# Altium PCB Gate_Driver_SMPS_V2.0_PCB2.PcbDoc
Units mil, origin at the board's own origin, x right, y up, seen from the top; angles counter-clockwise.
Board outline 2303.15 x 1181.1 mil, 2 copper layers (Top Layer, Bottom Layer), stack 22.485 mil thick; 42 components, 33 nets, 126 pads, 39 vias.
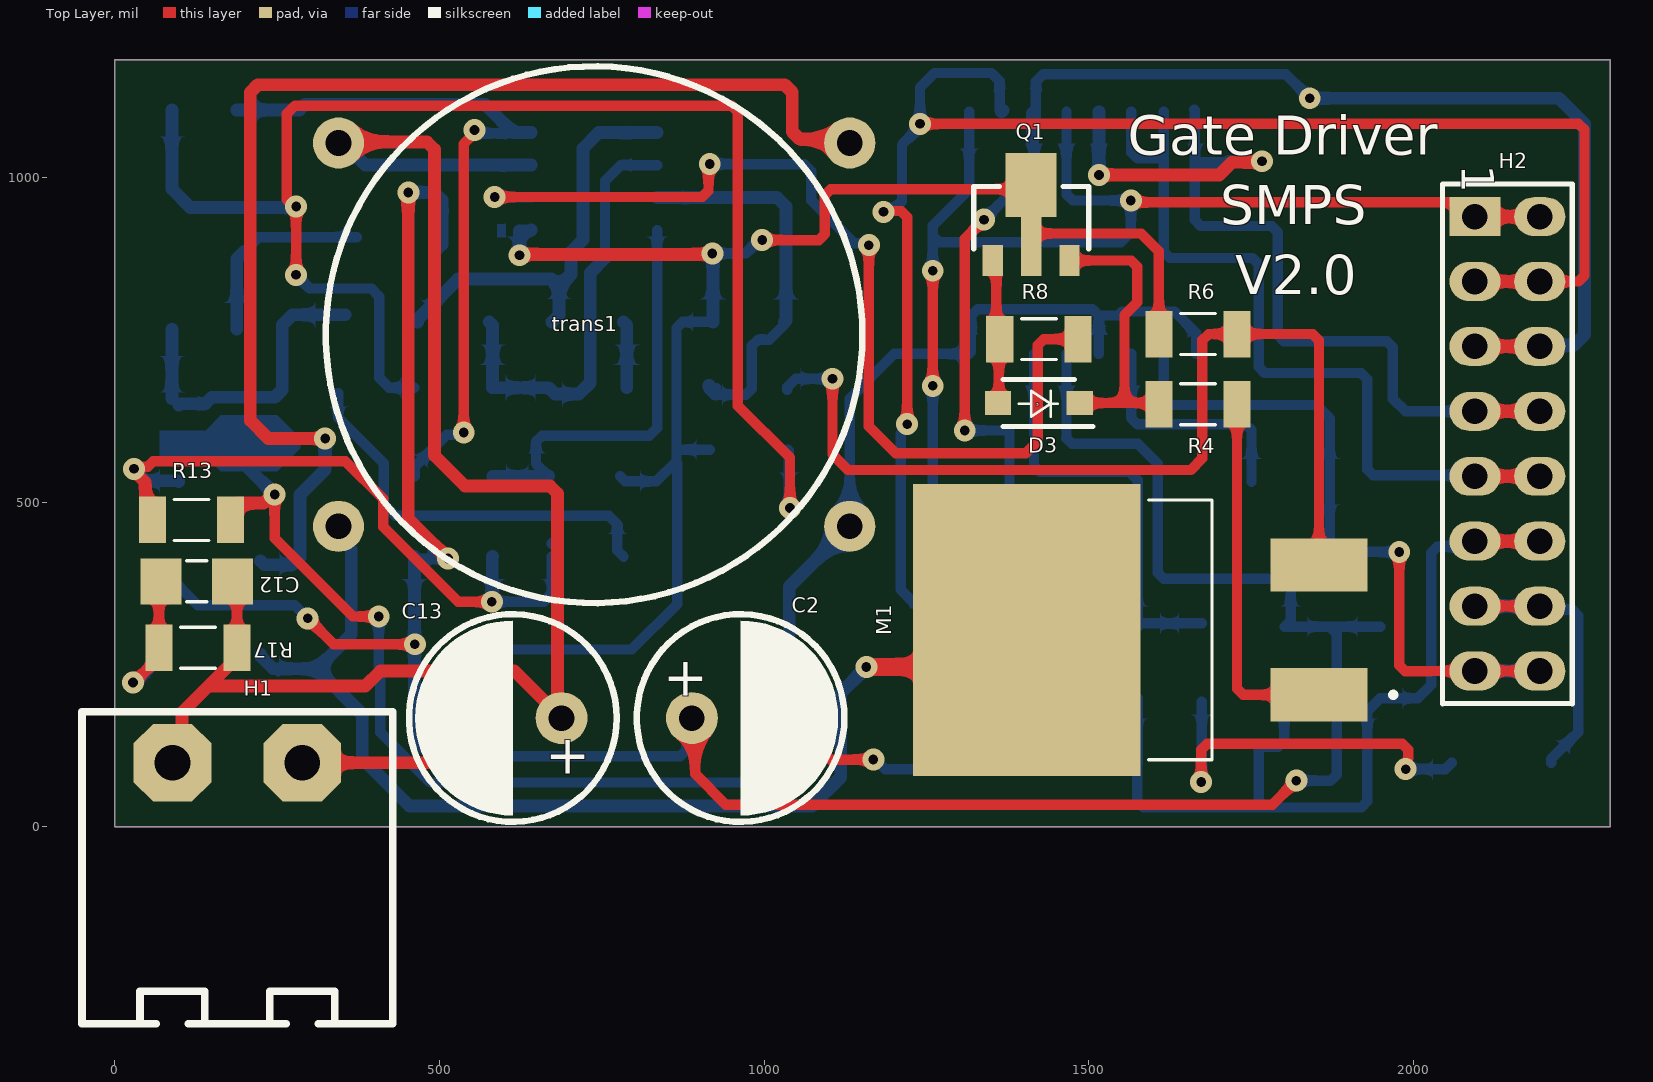
[diagram p0: Top Layer view]
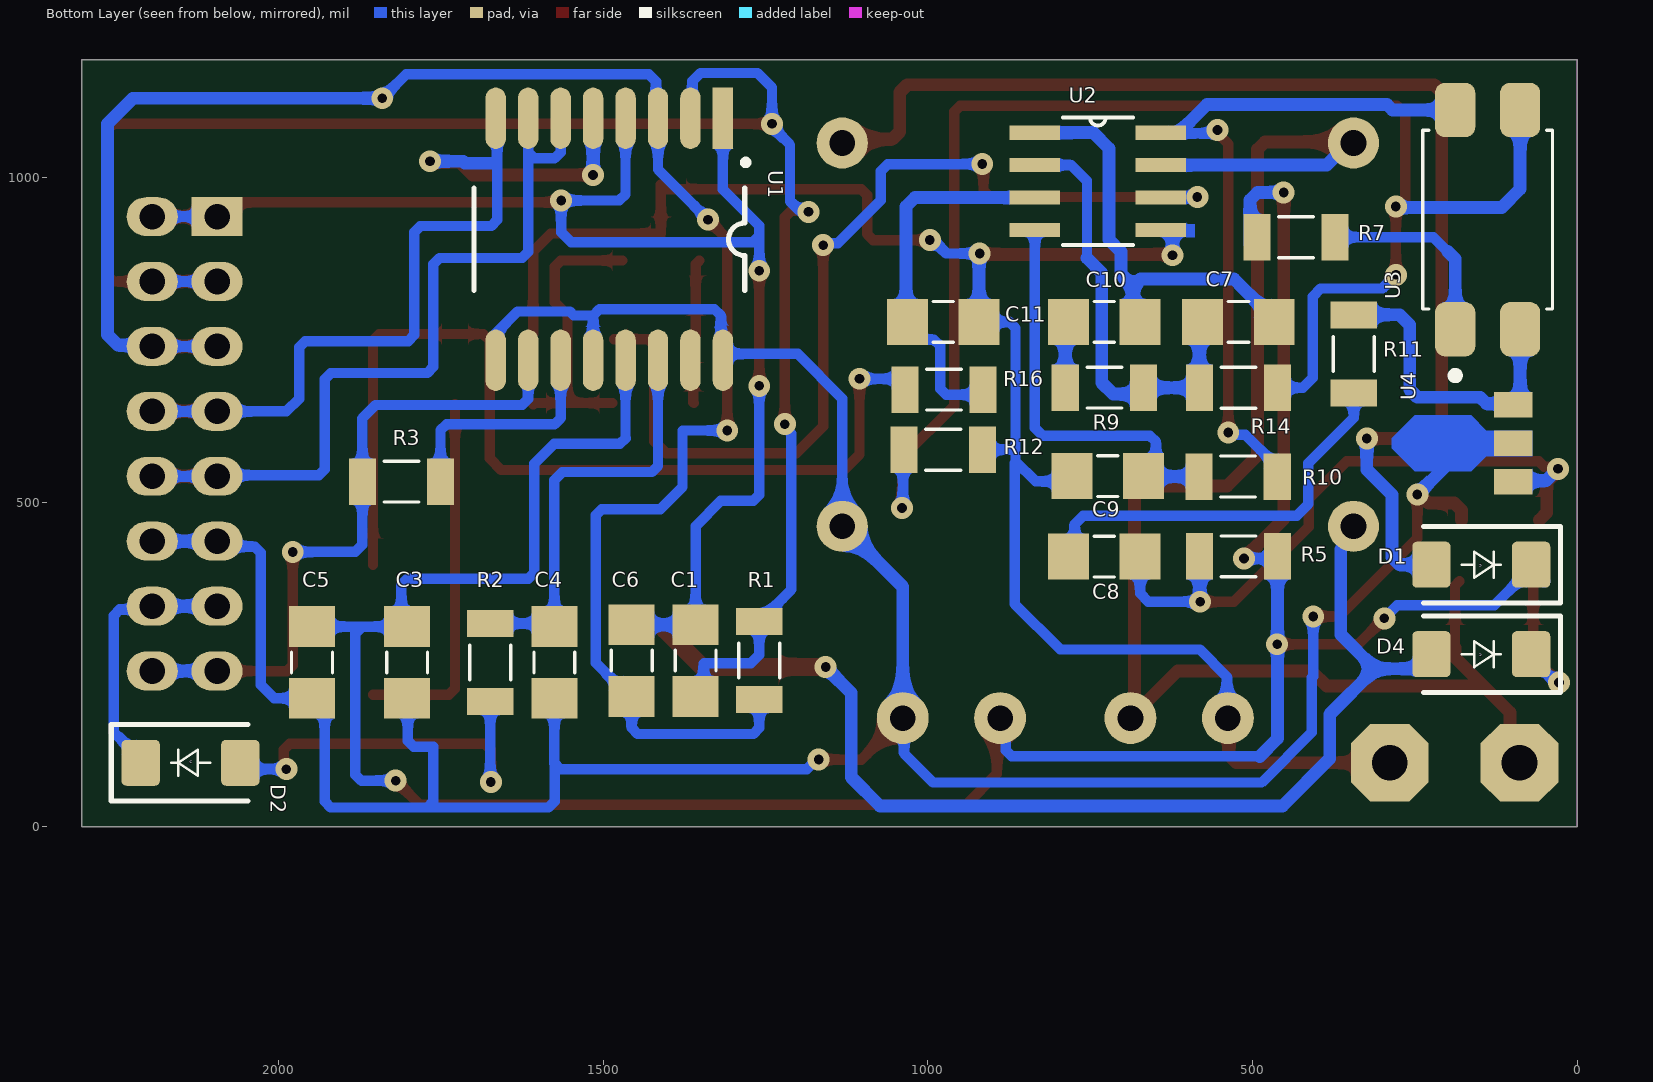
[diagram p1: Bottom Layer view, seen from below]
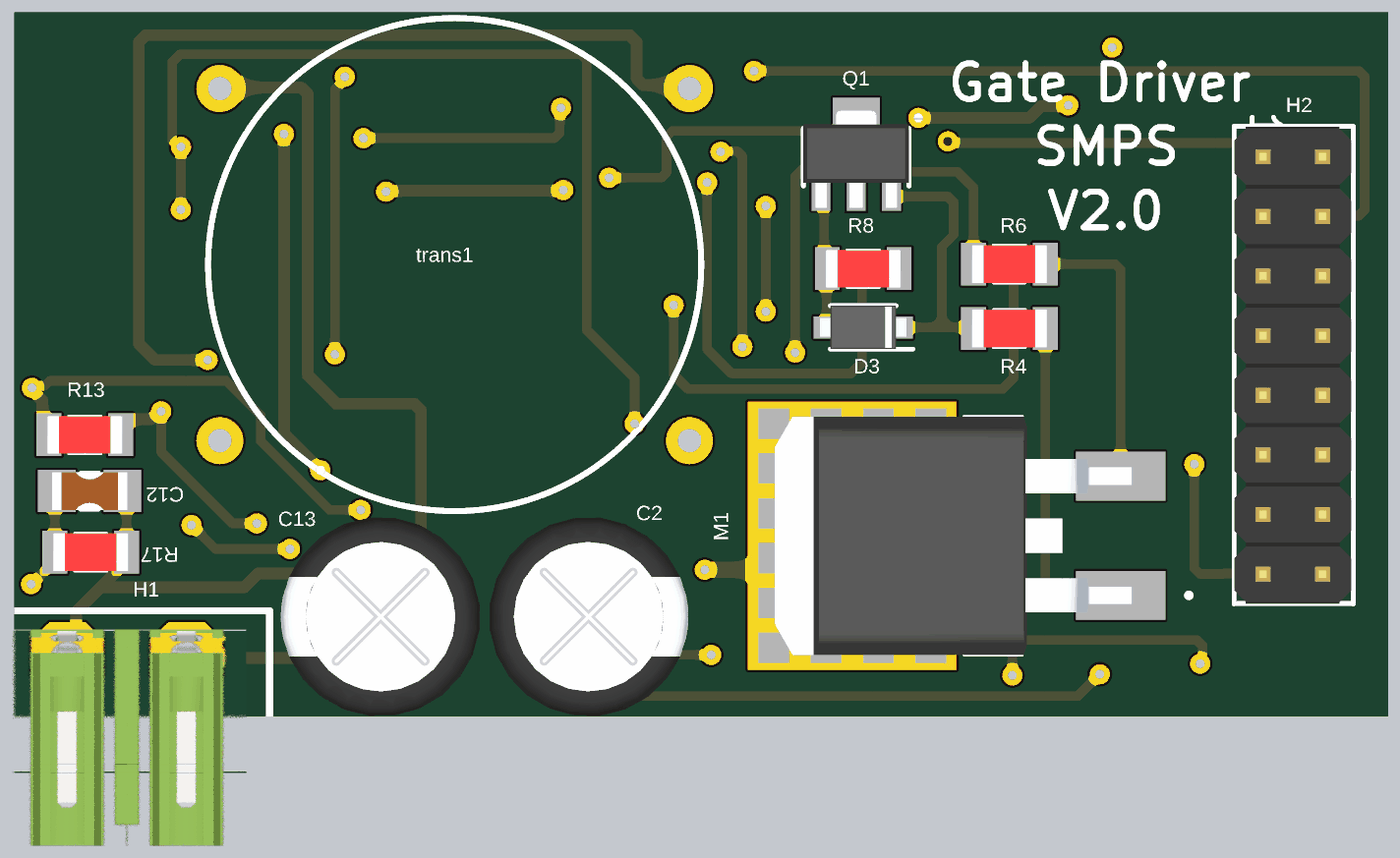
[diagram p2: 3D render of the assembled board from above, using the file's embedded part models]
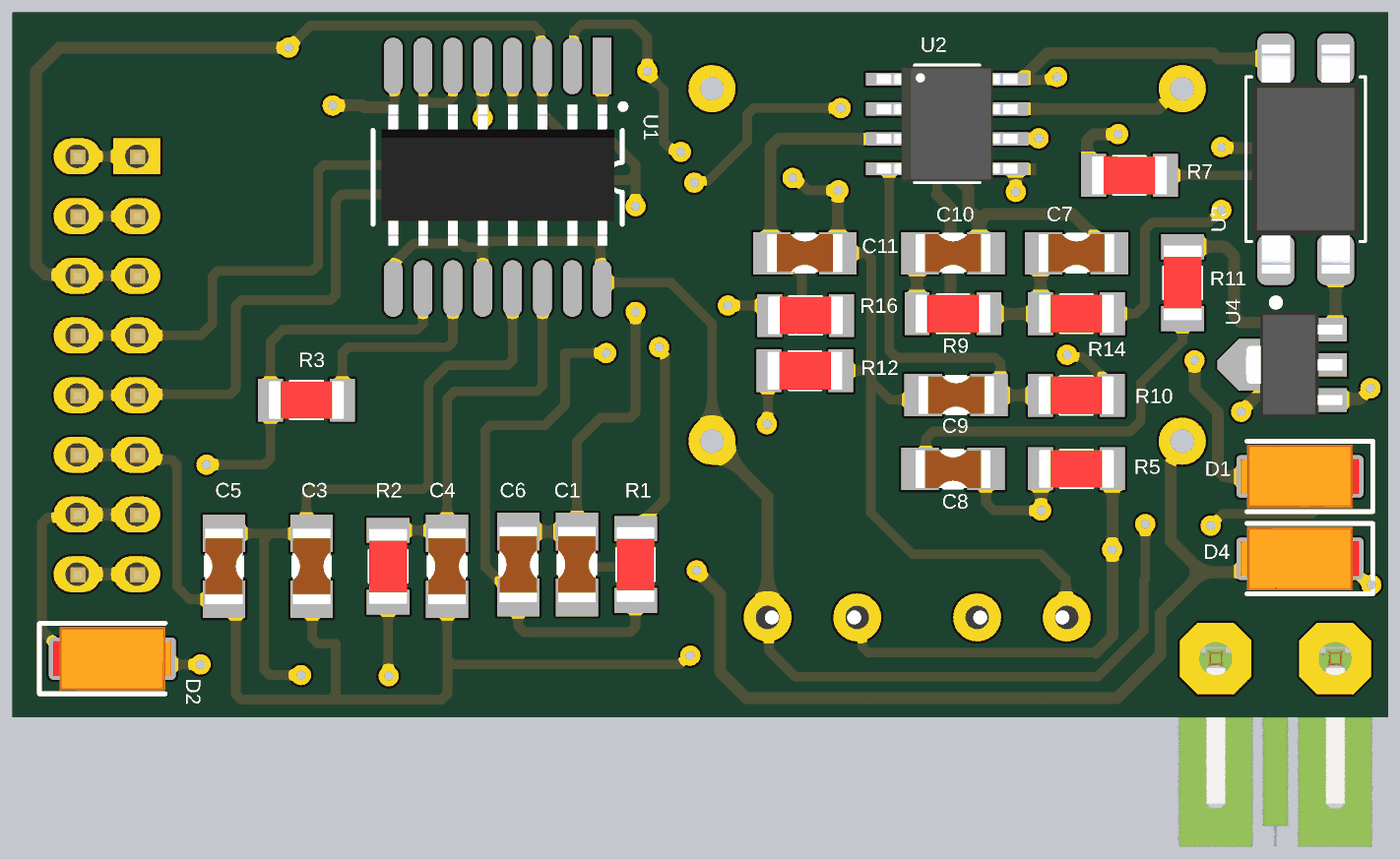
[diagram p3: 3D render of the assembled board from below, using the file's embedded part models]

## Layer stack, top to bottom
Top Solder: solder mask 0.4, Solder Resist, Dk 3.5
Top Layer: signal copper 1.4
Dielectric 1: dielectric 19.685, FR-4, Dk 4.8
Bottom Layer: signal copper 1.4
Bottom Solder: solder mask 0.4, Solder Resist, Dk 3.5

## Board outline
0,0 2303.15,0 2303.15,1181.1 0,1181.1

## Design rules (kind name [scope] priority, off if disabled: settings)
Clearance [All] p1: gap=10 ignorepadtopadclearanceinfootprint=FALSE except(1: Arc-Text Track-Text SMDPad-Text THPad-Text Via-Text)
HoleSize [All] p1: absolutevalues=TRUE maxlimit=3000 minlimit=11.81 maxpercent=80.000 minpercent=20.000
HoleToHoleClearance [All] p1: gap=1 allowstackedmicrovias=TRUE
PolygonConnect [All] p1: connectstyle=Relief reliefconductorwidth=10 reliefentries=4 polygonreliefangle="90 Angle" airgapwidth=10
RoutingVias [All] p1: holewidth=24 width=33.8 viastyle="Through Hole" minholewidth=15 minwidth=33.8 maxholewidth=31.5 maxwidth=34
SilkToSilkClearance [All] p1: silktosilkclearance=1
SilkToSolderMaskClearance [IsPad] p1: minsilkscreentomaskgap=1 clearancetoexposedcopper=TRUE
SolderMaskExpansion [All] p1: expansion=4 istentingtop=FALSE
Width [All] p1: maxlimit=27.56 minlimit=16 preferedwidth=19.68
26 further rules are at their usual default settings.

## Components (designator, comment, footprint, x,y, rotation, side; value= is the part's Value field where it differs from the comment)
C1 "0.1u" CAP_1206 1357.87,255.91 r90 bottom
C2 "470u-50v" CAP-1.5 888.78,167.32 r0 top
C3 "100p" CAP_1206 1802.17,252.95 r270 bottom
C4 "0.1u" CAP_1206 1575.39,252.95 r270 bottom
C5 "0.1u" CAP_1206 1948.82,252.95 r270 bottom
C6 "1n" CAP_1206 1456.3,255.91 r90 bottom
C7 "10nAC" CAP_1206 521.65,777.56 r180 bottom
C8 "10n" CAP_1206 728.35,415.94 r180 bottom
C9 "13.6n" CAP_1206 723.1,540.03 r180 bottom
C10 "10nAC" ? 728.35,777.56 r180 bottom
C11 "100pf" CAP_1206 976.38,777.56 r0 bottom
C12 "3.3n" CAP_1206 126.12,378 r0 top
C13 "470u-50v" CAP-1.5 687.99,167.32 r180 top
D1 "Diode" US1K_SMD 147.64,403.54 r0 bottom
D2 "Diode" US1K_SMD 2135.83,98.43 r180 bottom
D3 "1N5817" 1N5817W 1423.23,652.56 r180 top
D4 "Diode" US1K_SMD 147.64,265.75 r0 bottom
H1 "PS-IN" "TB2 - V" 88.58,98.43 r0 top
H2 "H2*8" HDR2X8 2094.88,939.76 r270 top
M1 "IRF540N" IRF540N_SMD 1579.72,303.15 r180 top
Q1 "B772-PNP" B772_SMD 1411.42,935.04 r0 top
R1 "4.7K" RES_1206 1259.84,255.91 r90 bottom
R2 "100" RES_1206 1674.21,252.95 r90 bottom
R3 "8.2" RES_1206 1811.02,531.5 r0 bottom
R4 "20" RES_1206 1668.31,650.59 r180 top
R5 "13.5K" RES_1206 521.65,416.34 r180 bottom
R6 "0.25/4W" RES_1206 1668.31,758.86 r0 top
R7 "1K" RES_1206 433,908 r0 bottom
R8 "47" RES_1206 1423.23,750.98 r0 top
R9 "11.2K" RES_1206 728.35,676.25 r0 bottom
R10 "600-POTENTIO" RES_1206 521.99,539.37 r180 bottom
R11 "16K" RES_1206 344,728 r270 bottom
R12 "1K" RES_1206 976.38,580.71 r0 bottom
R13 "2.5K" RES_1206 118.11,472.44 r180 top
R14 "5.6K" RES_1206 521.65,676.12 r180 bottom
R16 "42K" RES_1206 975.39,673.23 r0 bottom
R17 "510" RES_1206 127.95,275.59 r0 top
trans1 "C055928A" C055928A 344.49,462.6 r0 top
U1 "FOD8332" "SO16 - W" 1315.75,1091.18 r270 bottom
U2 "UC3843BN" UC3843_SMD 738.19,994.09 r180 bottom
U3 "PC817" PC816_SMD 137.8,935.04 r90 bottom
U4 "TL431" VREG_TL431IPK 177.17,590.55 r90 bottom

## Footprints (in the part's own frame and the unit in brackets; to place one, negate y for a bottom-side part, rotate by r counter-clockwise, add the part's x,y. Pads: shape width x height; smd on the part's side, far side on the other; paste and mask are expansions set on the pad)
1N5817W [mm]
  rect 1.02x0.94 smd: A(1.6,0) C(-1.6,0)
  silkscreen extent -2.11,-0.92 1.4,0.92, body extent -1.85,-0.92 1.85,0.92, height 1.35
B772_SMD [mm]
  rect 0.8x1.2 smd: B(-1.5,-1.6) E(1.5,-1.6)
  rect 0.8x2.3 smd paste-2 mask+0: C(0,-1.05)
  rect 2x2.5 smd: C(0,1.36)
  silkscreen extent -2.25,-1.15 2.25,1.3, body extent -2.25,-2.07 2.25,2.05, height 1.6
C055928A [mm]
  round 2 hole 1: 1(0,0) 2(0,15) 3(20,0) 4(20,15)
  silkscreen extent -0.5,-3 20.5,18
CAP-1.5 [mil]
  round 80 hole 39.37: 1(0,0) 2(150,0)
  silkscreen extent -85,-160 235,160, body extent -93,-167 241,167, height 551
CAP_1206 [mm]
  rect 1.6x1.8 smd: 1(-1.4,0) 2(1.4,0)
  silkscreen extent -0.4,-0.8 0.4,0.8, body extent -1.6,-0.8 1.6,0.8, height 1.5
HDR2X8 [mm] "Connector; Header; 4x2 Position"
  oval 1.524x2 hole 1: 1(0,2.54) 2(2.54,2.54) 2(2.54,0) 3(5.08,2.54) 3(5.08,0) 4(7.62,0) 4(7.62,2.54) 5(10.16,0) 5(10.16,2.54) 6(12.7,0) 6(12.7,2.54) 7(15.24,0) 7(15.24,2.54) 8(17.78,0) 8(17.78,2.54)
  rect 1.524x2 hole 1: 1(0,0)
  silkscreen extent -1.27,-1.27 19.08,3.81, body extent -1.24,-1.27 19.08,3.73, height 8.6
IRF540N_SMD [mm]
  rect 8.89x11.43 smd paste-7: D(4.445,0)
  rect 3.81x2.08 smd: G(-6.985,2.54) S(-6.985,-2.54)
  silkscreen extent -9.99,-5.08 -0.32,5.08, body extent -7.49,-5.08 7.75,5.08, height 4.83
PC816_SMD [mm]
  rrect50% 2.13x1.57 smd: 1(-4.29,1.27) 2(-4.29,-1.27) 3(4.29,-1.27) 4(4.29,1.27)
  silkscreen extent -6.25,-2.54 3.5,2.54, body extent -4.87,-2.29 4.87,2.29, height 4
RES_1206 [mm]
  rect 1.06x1.82 smd: 1(-1.528,0) 2(1.528,0)
  silkscreen extent -0.68,-0.8 0.68,0.8, body extent -1.6,-0.8 1.6,0.8, height 0.7
"SO16 - W" [mm]
  rect 2.4x0.8 smd: 1(0,0)
  oval 2.4x0.8 smd: 2(0,-1.27) 3(0,-2.54) 4(0,-3.81) 5(0,-5.08) 6(0,-6.35) 7(0,-7.62) 8(0,-8.89) 9(9.47,-8.89) 10(9.47,-7.62) 11(9.47,-6.35) 12(9.47,-5.08) 13(9.47,-3.81) 14(9.47,-2.54) 15(9.47,-1.27) 16(9.47,0)
  silkscreen extent 1.63,-9.74 6.73,0.99, body extent 1.65,-9.39 7.65,0.51, height 1.4
"TB2 - V" [mil] "Terminal Block Vertical"
  oct 120x120 hole 55.12: 1(0,0) 2(200,0)
  silkscreen extent -139,-402 339,79, body extent -100,-315 300,47, height 283
UC3843_SMD [mil]
  rect 78x22 smd: 1(-97,75) 2(-97,25) 3(-97,-25) 4(-97,-75) 5(97,-75) 6(97,-25) 7(97,25) 8(97,75)
  silkscreen extent -54,-98 54,98, body extent -118,-96 118,96, height 69
US1K_SMD [mm]
  rrect25% 1.5x1.8 smd: A(1.95,0) K(-1.95,0)
  silkscreen extent -3.1,-1.5 2.25,1.5, body extent -2.53,-1.35 2.52,1.35, height 2.17
VREG_TL431IPK [mm]
  rect 1x1.5 smd paste-2 mask+0: A(0,-2)
  rect 1x1.5 smd: C(1.5,-2) R(-1.5,-2)
  Top Layer region: 1.1,1.85 1.1,-0.35 0.5,-0.95 0.5,-2.75 -0.5,-2.75 -0.5,-0.95 -1.1,-0.35 -1.1,1.85 -0.2,2.75 0.2,2.75
  body extent -2.25,-2.56 2.25,1.54, height 1.6
? [mm]
  rect 1.6x1.8 smd: 2(1.4,0) S(-1.4,0)
  silkscreen extent -0.4,-0.8 0.4,0.8, body extent -1.6,-0.8 1.6,0.8, height 1.5

## Part data
C1 C2 C3 C4 C5 C6 C13: library part CAP-DC
C7 C8 C9 C10 C11 C12: library part CAP-AC
D3: "Lite-On 1N5817, Schottky Diode, 20V 3A, 2-Pin DO-201AD", Average Rectified Current=3A, Case/Package=DO-201AD, Forward Voltage=850mV, Manufacturer=Vishay, Manufacturer Part Number=1N5820, Max Forward Surge Current (Ifsm)=80A, Max Operating Temperature=125°C, Max Repetitive Reverse Voltage (Vrrm)=20V, Max Reverse Current=150uA, Max Reverse Leakage Current=2mA, Min Operating Temperature=-65°C, Supplier Part Number 1=700-9899, ComponentLink1Description=http://www.liteon-semi.com/download.php?hSFile=1N5820-1N5822-5.pdf&hDFile=tecfile01312524214.pdf&src-supplier=Avnet+Asia, ComponentLink1URL=http://www.liteon-semi.com/download.php?hSFile=1N5820-1N5822-5.pdf&hDFile=tecfile01312524214.pdf&src-supplier=Avnet+Asia, ComponentLink2Description=http://docs-usa.electrocomponents.com/techlib:/itc_doclist_US.htm?stockno=7009899&src-supplier=Allied+Electronics, ComponentLink2URL=http://docs-usa.electrocomponents.com/techlib:/itc_doclist_US.htm?stockno=7009899&src-supplier=Allied+Electronics, Element Configuration=Single, Forward Current=3A, Height=5.3mm, Length=9.5mm, Max Surge Current=80A, Mount="Through Hole", Number of Pins=2, Packaging=Bulk, Peak Non-Repetitive Surge Current=80A, Radiation Hardening=No, RoHS Compliant=No, Stock 1=0, Supplier 1=RSComponents, Width=5.3mm
H1: library part PS-plug
H2: library part "Header 8X2"
M1: "Mosfet, Power; N-ch; Vdss 100V; Rds(on) 44MILLIOHMS; Id 33A; TO-220AB; Pd 130W; -55DEG", Case/Package=TO-220AB, Continuous Drain Current (ID)=33A, Gate to Source Voltage (Vgs)=20V, Manufacturer="International Rectifier", Max Operating Temperature=175°C, Min Operating Temperature=-55°C, Power Dissipation=130W, Supplier Part Number 1=IRF540NPBF-TUBE, ComponentLink1Description=http://www.produktinfo.conrad.com/datenblaetter/150000-174999/162412-da-01-en-IRF_540_N.pdf?src-supplier=Conrad, ComponentLink1URL=http://www.produktinfo.conrad.com/datenblaetter/150000-174999/162412-da-01-en-IRF_540_N.pdf?src-supplier=Conrad, Manufacturer Part Number=IRF540N, Mount="Through Hole", Number of Elements=1, Number of Pins=3, RoHS Compliant=No, Stock 1=0, Supplier 1="Future Electronics"
R1 R2 R3 R4 R5 R6 R7 R8 R9 R10 R11 R12 R13 R14 R16 R17: library part RES
trans1: library part "flyback trans"
U1: library part TLP5214A
U2: "IC REG CTRLR BST/FLYBK 8-MINIDIP", Case/Package=PDIP, Frequency=250kHz, Manufacturer=STMicroelectronics, Max Frequency=500kHz, Max Operating Temperature=150°C, Max Power Dissipation=800mW, Max Supply Current=17mA, Max Supply Voltage=30V, Min Operating Temperature=-40°C, Min Supply Voltage=12V, Output Current=1A, Output Voltage=5.1V, Package Quantity=50, ComponentLink1Description=http://www.st.com/content/ccc/resource/technical/document/datasheet/b6/e8/cc/ba/4f/cd/42/9b/CD00000966.pdf/files/CD00000966.pdf/jcr:content/translations/en.CD00000966.pdf?src-supplier=Digi-Key, ComponentLink1URL=http://www.st.com/content/ccc/resource/technical/document/datasheet/b6/e8/cc/ba/4f/cd/42/9b/CD00000966.pdf/files/CD00000966.pdf/jcr:content/translations/en.CD00000966.pdf?src-supplier=Digi-Key, ComponentLink2Description=http://www.mouser.com/ds/2/389/uc2842b-974450.pdf?src-supplier=Mouser, ComponentLink2URL=http://www.mouser.com/ds/2/389/uc2842b-974450.pdf?src-supplier=Mouser, ComponentLink3Description=http://www.st.com/web/en/resource/technical/document/datasheet/CD00000966.pdf?src-supplier=Avnet, ComponentLink3URL=http://www.st.com/web/en/resource/technical/document/datasheet/CD00000966.pdf?src-supplier=Avnet, ComponentLink4Description=http://www.st.com/web/en/resource/technical/document/datasheet/CD00000966.pdf?src-supplier=Future+Electronics, ComponentLink4URL=http://www.st.com/web/en/resource/technical/document/datasheet/CD00000966.pdf?src-supplier=Future+Electronics, ComponentLink5Description=https://www.verical.com/server-webapp/html/getDatasheet?partID=66041&src-supplier=Verical, ComponentLink5URL=https://www.verical.com/server-webapp/html/getDatasheet?partID=66041&src-supplier=Verical, ComponentLink6Description=http://www.produktinfo.conrad.com/datenblaetter/1100000-1199999/001185662-da-01-en-IC_REG_CTRLR_PWM_CM_UC3843BN_DIP_8_STM.pdf?src-supplier=Conrad, ComponentLink6URL=http://www.produktinfo.conrad.com/datenblaetter/1100000-1199999/001185662-da-01-en-IC_REG_CTRLR_PWM_CM_UC3843BN_DIP_8_STM.pdf?src-supplier=Conrad, Duty Cycle=100%, Fall Time=50ns, Height=3.32mm, Lead Free="Lead Free", Length=10.92mm, Manufacturer Part Number=UC3843BN, Max Duty Cycle=100%, Mount="Through Hole", Number of Outputs=1, Number of Pins=8, Packaging=Rail/Tube, Power Dissipation=800mW, Pricing 1="1=0.9063, 10=0.7523, 25=0.7389, 100=0.6172, 250=0.5737, 500=0.4903, 1000=0.3493, 4000=0.3129, 5000=0.3123, 6000=0.3104, 8000=0.3085, 10000=0.3066, 20000=0.3047, 25000=0.3027, 30000=0.3008, 50000=0.2988 (USD)", Radiation Hardening=No, REACH SVHC="No SVHC", Rise Time=50ns, RoHS Compliant=Yes, Series=-, Stock 1=669, Supplier 1="Arrow Electronics", Supplier Part Number 1=UC3843BN, Switching Frequency=500kHz, Topology=Boost,Flyback, Weight=0.032805oz, Width=6.6mm
U3: "Optocoupler DC-IN 1-CH Transistor DC-OUT 4-Pin PDIP Sleeve", Case/Package=PDIP, Collector Emitter Saturation Voltage=200mV, Collector Emitter Voltage (VCEO)=35V, Current Transfer Ratio=600%, Forward Current=50mA, Forward Voltage=1.4V, Manufacturer=Sharp, Max Operating Temperature=100°C, Min Operating Temperature=-30°C, Power Dissipation=200mW, Reverse Breakdown Voltage=6V, Fall Time=18000ns, Input Type=DC, Manufacturer Part Number=PC817, Mount="Through Hole", Number of Elements=1, Number of Pins=4, Packaging=Sleeve, Rise Time=18000ns, RoHS Compliant=No, Stock 1=0, Supplier 1="Arrow Electronics", Supplier Part Number 1=PC817
U4: library part TL431CZ, "V-Ref Adjustable 2.495V to 36V 100mA 3-Pin TO-92 Bulk", Case/Package=TO-92, Cathode Current=1mA, Manufacturer=STMicroelectronics, Max Input Voltage=37V, Max Operating Temperature=70°C, Max Output Current=100mA, Max Output Voltage=36V, Min Operating Temperature=0°C, Min Output Voltage=2.495V, Package Quantity=1, Temperature Coefficient=100ppm/°C, Tolerance=2.21%, Accuracy=2%, ComponentLink1Description=http://www.st.com/web/en/resource/technical/document/datasheet/CD00000986.pdf?src-supplier=Digi-Key, ComponentLink1URL=http://www.st.com/web/en/resource/technical/document/datasheet/CD00000986.pdf?src-supplier=Digi-Key, ComponentLink2Description=http://www.st.com/content/ccc/resource/technical/document/datasheet/2d/27/af/41/03/e2/44/8e/CD00000986.pdf/files/CD00000986.pdf/jcr:content/translations/en.CD00000986.pdf?src-supplier=Digi-Key, ComponentLink2URL=http://www.st.com/content/ccc/resource/technical/document/datasheet/2d/27/af/41/03/e2/44/8e/CD00000986.pdf/files/CD00000986.pdf/jcr:content/translations/en.CD00000986.pdf?src-supplier=Digi-Key, ComponentLink3Description=http://www.farnell.com/datasheets/1690313.pdf?src-supplier=Element14, ComponentLink3URL=http://www.farnell.com/datasheets/1690313.pdf?src-supplier=Element14, ComponentLink4Description=http://www.rapidonline.com/pdf/82-0290.pdf?src-supplier=Rapid+Electronics, ComponentLink4URL=http://www.rapidonline.com/pdf/82-0290.pdf?src-supplier=Rapid+Electronics, ComponentLink5Description=https://www.verical.com/server-webapp/html/getDatasheet?partID=98639&src-supplier=Verical, ComponentLink5URL=https://www.verical.com/server-webapp/html/getDatasheet?partID=98639&src-supplier=Verical, ComponentLink6Description=http://www.produktinfo.conrad.com/datenblaetter/150000-174999/155641-da-01-en-SPG_REF_TL431CZ_STM.pdf?src-supplier=Conrad, ComponentLink6URL=http://www.produktinfo.conrad.com/datenblaetter/150000-174999/155641-da-01-en-SPG_REF_TL431CZ_STM.pdf?src-supplier=Conrad, Height=4.4mm, Lead Free="Lead Free", Length=4.7mm, Manufacturer Part Number=TL431CZ, Mount="Through Hole", Nominal Supply Current=1mA, Number of Channels=1, Number of Pins=3, Output Current=100mA, Output Type=Adjustable, Output Voltage=36V, Packaging=Bulk, Pricing 1="1=0.4405, 10=0.3422, 100=0.2291, 500=0.1883, 1000=0.1722, 2500=0.1137, 10000=0.083, 1=0.3921, 10=0.3046, 100=0.2039, 500=0.1676, 1000=0.1299, 2500=0.1012, 10000=0.0723 (USD)", Radiation Hardening=No, REACH SVHC="No SVHC", Reference Type=Shunt,Adjustable, Reference Voltage=36V, RoHS Compliant=Yes, Series=-, Stock 1=5333, Supplier 1="Arrow Electronics", Supplier Part Number 1=TL431CZ, Supply Current=1mA, Weight=0.01lb, Width=3.7mm
D1 D2 D4: Datasheet=https://diotec.com/de/produktliste/D.html, ki_description=Diode, ki_keywords=Diode, Reference=D

## Via types
v1: diameter 33.8, hole 15, Top Layer to Bottom Layer, 39 vias

## Nets (pads, with @x,y where several pads share a name; then routed paths per layer and width w, separated by ;. In a path a pad name is that pad's centre, name@x,y a point inside that pad or via, vN(x,y) a via of type N, cw(c..) or ccw(c..) an arc to the next point about the centre after c; other vN are vias at no path point)
C: D2.K H2.7 | length 509
  Top Layer w16: H2.7@2094.88,339.76 H2.7@2194.88,339.76
  Bottom Layer w16: H2.7@2194.88,339.76 2200,334.65 2244.56,334.65 2253.94,325.27 2253.94,145.67 2212.6,104.33 D2.K
  Bottom Layer w19.68: H2.7@2094.88,339.76 H2.7@2194.88,339.76
F: C6.1 H2.3 R1.1 U1.3 | length 3018.9
  Top Layer w16: v1(1309.06,610.24) 1309.06,905.51 v1(1338.58,935.04)
  Top Layer w19.68: H2.3@2094.88,739.76 H2.3@2194.88,739.76
  Bottom Layer w16: R1.1 1259.84,152.09 1269.22,142.72 1446.93,142.72 1456.3,152.09 C6.1 1460.24,200.79 1511.81,252.36 1511.81,479.8 1502.44,489.17 1412.4,489.17 1377.95,523.62 1377.95,610.24 v1(1309.06,610.24) ; v1(1338.58,935.04) 1415.75,1012.2 U1.3 1418.71,1094.15 1418.71,1147.71 1430,1159 1803.6,1159 v1(1840.55,1122.05) ; H2.3@2094.88,739.76 H2.3@2194.88,739.76
  Bottom Layer w19.68: U1.3@1412.06,1057.64 1413.49,1059.07 1413.49,1098.92 U1.3@1415.75,1101.18 ; v1(1840.55,1122.05) 2224.41,1122.05 2263.78,1082.68 2263.78,757.87 2247.37,741.46 2196.58,741.46 H2.3@2194.88,739.76
G: H2.8 R3.2 U1.10 | length 1139
  Top Layer w16: v1(1978.35,423.23) 1978.35,248.54 1987.72,239.16 2026.15,239.16 2026.75,239.76 2094.88,239.76 H2.8@2194.88,239.76
  Bottom Layer w16: U1.10@1615.75,728.35 1615.75,658.98 1625.12,649.61 1850.39,649.61 1871.18,628.82 R3.2 1871.18,434.17 1882.13,423.23 v1(1978.35,423.23)
  Bottom Layer w19.68: H2.8@2094.88,239.76 H2.8@2194.88,239.76
GNDK: H2.4 U1.5 U1.8 | length 1522
  Top Layer w19.68: v1(1515.75,1003.94) 1701.07,1003.94 1720.57,1023.44 1765.44,1023.44 v1(1767,1025) ; H2.4@2094.88,639.76 H2.4@2194.88,639.76
  Bottom Layer w16: U1.8@1662.78,1104.15 1663.39,1103.54 1663.39,1021.84 1663.39,934.57 1672.76,925.2 1781.97,925.2 1791.34,915.82 1791.34,757.4 1800.71,748.03 1959.13,748.03 1968.5,738.66 1968.5,659.45 1988.19,639.76 2094.88,639.76 H2.4@2194.88,639.76
  Bottom Layer w19.68: v1(1515.75,1003.94) U1.5@1515.75,1101.18 ; 1666.17,1021.84 1713.1,1021.84 1716.25,1025 v1(1767,1025)
Isns: M1.S R6.2 R16.2 | length 1498.3
  Top Layer w16: v1(1105.32,689.96) 1105.32,573.82 1129.8,549.34 1657.09,549.34 1675.2,567.44 1675.2,749.49 1684.57,758.86 R6.2 1845.35,758.86 1854.72,749.49 M1.S
  Bottom Layer w16: R16.2 1035.55,677.09 1048.42,689.96 v1(1105.32,689.96)
NetC4_1: C4.1 R2.2 U1.14 | length 668.1
  Bottom Layer w16: U1.14@1415.75,728.35 1415.75,555.63 1425.12,546.26 1562.99,546.26 1575.39,533.86 C4.1 1580.43,313.11 R2.2
NetC7_1: C7.1 R9.1 R14.1 U2.2 | length 676
  Bottom Layer w16: 755,875.87 755,995 779.09,1019.09 U2.2
  Bottom Layer w19.68: C7.1 581.81,772.52 R14.1 668.06,676.12 R9.1 678.1,666.34 714.57,666.34 732.13,683.9 732.13,853 755,875.87
NetC7_2: C7.2 C10.2 U2.1 | length 663.2
  Bottom Layer w19.68: C7.2 466.54,781.5 515.2,830.16 528.54,843.5 547.73,843.5 672.52,843.5 684.06,831.97 ; C10.2 684.06,788.39 684.06,831.97 ; U2.1 745.28,1069.09 721,1044.82 721,904 702.44,885.44 702.44,850.36 684.06,831.97
NetC8_1: C8.1 R11.2 | length 626.7
  Bottom Layer w16: R11.2 344,630 414,560 414,497 432,479 761,479 773.99,466.01 773.99,425.41 C8.1
NetC8_2: C8.2 R5.1 R13.2 U4.R | length 1064
  Top Layer w16: v1(29.53,551.18) 32.93,554.59 50.81,554.59 59.32,563.1 354.9,563.1 413.1,504.9 413.1,461.9 528.54,346.46 v1(580.71,346.46)
  Top Layer w19.68: v1(29.53,551.18) 29.53,547.36 46.93,529.96 46.93,483.46 R13.2
  Bottom Layer w16: v1(580.71,346.46) 660.43,346.46 673.23,359.25 C8.2 ; C8.2@672.83,436.42 C8.2@673.23,436.02
  Bottom Layer w19.68: v1(29.53,551.18) 47.74,532.97 96.95,532.97 U4.R ; v1(580.71,346.46) 581.26,347.01 581.26,415.79 R5.1
NetC9_2: C9.2 R10.1 U2.4 | length 647
  Bottom Layer w16: C9.2 648.62,559.38 648.62,592.99 657.99,602.36 822.83,602.36 835.19,614.72 U2.4
  Bottom Layer w19.68: R10.1 667.32,539.37 C9.2
NetC10_1: C10.S R9.2 | length 103.4
  Bottom Layer w19.68: C10.S 788.5,772.52 R9.2
NetC11_2: C11.2 R16.1 U2.3 | length 621.4
  Bottom Layer w16: R16.1 923.11,665.35 971.93,665.35 981.3,674.73 981.3,740.75 990.67,750.13 1008,750.13 1031.5,773.62 C11.2 ; R16.1@915.35,680.12 920.28,675.2 R16.1@926.38,675.2
  Bottom Layer w19.68: U2.3 1019.96,969.09 1033.79,955.27 1033.79,779.85 C11.2 ; R16.1@915.35,680.12 915.35,677.36 R16.1@926.38,666.34
NetC12_1: C12.1 D4.K R17.1 | length 238.9
  Top Layer w16: v1(28,222) 29.17,222 67.8,260.63 R17.1 67.8,374.8 C12.1
  Bottom Layer w16: v1(28,222) 31.41,225.41 36.43,225.41 70.87,259.84 D4.K
NetD1_A: D1.A trans1.4 | length 1900.1
  Top Layer w19.68: v1(324,598) 236.37,598 208.66,625.7 208.66,1131.19 220.19,1142.72 1031.78,1142.72 1043.31,1131.19 1043.31,1070.32 1054.84,1058.79 1126.25,1058.79 trans1.4
  Bottom Layer w19.68: D1.A@224.41,409.45 230.32,403.54 273.74,403.54 285.28,415.07 285.28,511.38 324,550.1 v1(324,598)
NetD2_A: D2.A R2.1 | length 607.5
  Top Layer w16: v1(1673.23,68.9) 1673.23,118.58 1682.6,127.95 1982.97,127.95 1992.35,118.58 1992.35,105.33 1991.59,104.58 1991.59,91.99 v1(1988.19,88.58)
  Bottom Layer w16: v1(1673.23,68.9) 1674.21,69.88 R2.1 ; v1(1988.19,88.58) 2049.21,88.58 D2.A
NetD3_A: D3.A Q1.B R8.1 | length 225.1
  Top Layer w16: Q1.B 1357.72,866.69 1357.72,756.34 R8.1 1361.65,749.57 1361.65,653.98 D3.A
NetD3_C: D3.C Q1.E R4.2 | length 449.2
  Top Layer w16: Q1.E 1565.43,872.05 1574.8,862.67 1574.8,807.66 1555.12,787.98 1555.12,652.56 ; D3.C 1555.12,652.56 ; R4.2 1606.18,652.56 1555.12,652.56
NetD4_A: D4.A M1.D trans1.1 | length 1713.4
  Top Layer w27.56: v1(1157.48,246.06) 1347.64,246.06 M1.D
  Bottom Layer w19.68: D4.A 224.41,262.8 244.09,243.11 311.11,243.11 ; 364.17,426.93 364.17,296.17 311.11,243.11 ; v1(1157.48,246.06) 1157.48,245.23 1118.11,205.86 1118.11,76.11 1074,32 454,32 381,105 381,173.22 311.11,243.11
NetM1_G: M1.G R4.1 | length 568.2
  Top Layer w16: R4.1 1728.46,212.52 1737.84,203.15 M1.G
NetR3_1: R3.1 U1.11 | length 371
  Bottom Layer w16: U1.11@1565.75,728.35 1565.75,629.45 1575.12,620.08 1741.49,620.08 1750.87,610.71 R3.1
NetR7_1: R7.1 U3.1 | length 307.2
  Bottom Layer w16: 199.33,885.83 221.5,908 R7.1
  Bottom Layer w19.68: U3.1 187.8,874.3 199.33,885.83
NetR11_1: R11.1 U3.2 U4.C | length 478.5
  Bottom Layer w19.68: U4.C@87.8,659.45 U3.2 ; U4.C 100.44,651.62 139.62,651.62 149.42,661.42 246.34,661.42 257.87,672.95 257.87,772.64 273.74,788.5 R11.1@354.33,788.5
PGND: C9.1 C11.1 C13.2 H1.2 Q1.C R6.1 R12.1 U2.5 | length 2829.3
  Top Layer w16: v1(997.05,903.54) 1084.13,903.54 1093.5,912.92 1093.5,972.63 1102.88,982 1404.82,982 1411.42,988.59 Q1.C@1411.42,913.67 ; Q1.C@1411.42,905.92 1419.17,913.67 1580.78,913.67 1608.15,886.3 R6.1
  Top Layer w19.68: H1.2 524.87,98.43 536.4,109.96 536.4,165.73 C13.2 ; v1(623.25,880.25) 624.56,881.56 918.96,881.56 v1(920.28,882.87)
  Bottom Layer w16: C13.2 539.32,168.65 539.32,231.32 581,273 796.14,273 866.14,343 866.14,559.53 ; C9.1 786.24,532 834.17,532 865.16,562.99 865.16,584.65 ; R12.1 869.09,580.71 865.16,584.65 ; v1(920.28,882.87) 971.56,882.87 992.23,903.54 v1(997.05,903.54) ; C11.1 874.53,777.56 865.16,768.19 865.16,584.65
  Bottom Layer w19.68: v1(623.25,880.25) 623.25,917.94 640.03,917.94 U2.5 ; v1(920.28,882.87) 921.26,881.89 C11.1
PMW: H2.5 U1.6 U1.7 | length 1331.9
  Top Layer w19.68: H2.5@2094.88,539.76 H2.5@2194.88,539.76
  Bottom Layer w16: U1.6@1565.75,1101.18 1565.75,1038.9 1575.12,1029.53 1606.38,1029.53 1615.75,1038.9 ; U1.7@1615.75,1101.18 1615.75,1038.9 ; H2.5@2194.88,539.76 2094.88,539.76 2093.31,541.34 1938.51,541.34 1929.13,550.71 1929.13,689.45 1919.76,698.82 1771.18,698.82 1761.81,708.19 1761.81,866.14 1751.97,875.98 1625.12,875.98 1615.75,885.36 1615.75,1038.9
pwm: R8.2 U2.6 | length 1533
  Top Layer w16: v1(585,970) 905,970 914.37,979.37 914.37,1017.72 916.34,1019.69 v1(916.34,1020.67) ; v1(1161.42,895.67) 1161.42,616.66 1202.74,575.34 1403.15,575.34 1421.26,593.44 1421.26,741.61 1430.63,750.98 R8.2
  Bottom Layer w16: v1(585,970) 585.45,969.55 640.74,969.55 U2.6 ; v1(916.34,1020.67) 1062.01,1020.67 1072.83,1009.84 1072.83,964.57 1138.65,898.75 1158.34,898.75 v1(1161.42,895.67)
SGND: C2.2 C3.2 C4.2 C5.2 H2.6 R13.1 trans1.3 U1.9 U1.12 U1.16 U4.A | length 4679
  Top Layer w16: v1(246.06,511.81) 246.06,443.94 366.18,323.82 v1(406.5,323.82) ; C2.2 1102.76,103.35 v1(1168.31,103.35)
  Top Layer w19.68: R13.1 178.27,487.4 189.29,498.43 228.86,498.43 242.24,511.81 v1(246.06,511.81) ; H2.6@2094.88,439.76 H2.6@2194.88,439.76
  Bottom Layer w16: v1(406.5,323.82) 406.5,231.61 408.84,229.26 408.84,145.28 486.12,68 992,68 1036.7,112.7 1036.7,165.24 C2.2 ; trans1.3 1131.89,659.45 1200.79,728.35 1315.75,728.35 1318.71,731.31 1318.71,787.22 1328.74,797.24 1505.91,797.24 1515.75,787.4 ; v1(1168.31,103.35) 1171.82,103.35 1186.58,88.58 1566.02,88.58 1574.8,97.36 ; U1.12@1515.75,728.35 1515.75,787.4 ; C4.2 1575.39,97.96 1574.8,97.36 ; U1.9@1665.75,728.35 1665.75,759.84 1632,793.59 1551.77,793.59 1545.58,787.4 1515.75,787.4 ; C3.2 1801.18,196.85 1801.18,132.4 1791.81,123.03 1761.81,123.03 1761.81,38.9 1771.18,29.53 ; H2.6@2094.88,439.76 2086.46,431.34 2036.93,431.34 2027.56,421.97 2027.56,218.5 2006.89,197.83 C5.2 1929.13,178.15 1929.13,38.9 1919.76,29.53 1771.18,29.53 ; 1574.8,97.36 1574.8,39.37 1584.65,29.53 1771.18,29.53
  Bottom Layer w19.68: 203.74,592.52 203.74,554.13 v1(246.06,511.81) ; C2.2 1038.78,369.49 trans1.3@1130.91,461.62 ; H2.6@2094.88,439.76 H2.6@2194.88,439.76
uGND: C1.2 C6.2 H2.1 U1.1 U1.4 | length 2316.7
  Top Layer w16: v1(1259.84,679.13) v1(1259.84,856.3) ; v1(1564.96,964.57) 1567.76,961.76 2072.88,961.76 H2.1@2094.88,939.76
  Top Layer w19.68: H2.1@2094.88,939.76 H2.1@2194.88,939.76
  Bottom Layer w16: v1(1259.84,679.13) 1259.84,511.34 1269.22,501.97 1318.9,501.97 1357.87,462.99 C1.2 ; v1(1259.84,856.3) 1259.84,909.98 ; U1.1@1315.75,1101.18 U1.1 1315.75,981.75 1259.84,925.84 1259.84,909.98 ; U1.4@1465.75,1101.18 1465.75,973.94 1475.12,964.57 v1(1564.96,964.57) 1564.96,915.35 1549.75,900.14 1269.68,900.14 1259.84,909.98 ; H2.1@2094.88,939.76 H2.1@2194.88,939.76
  Bottom Layer w19.68: C1.2 C6.2
VCC: C1.1 H2.2 R1.2 U1.2 | length 2820.8
  Top Layer w16: v1(1184,947.1) 1185.26,948.36 1211.1,948.36 1220.47,938.99 v1(1220.47,620.08) ; v1(1240.16,1082.68) 2254.41,1082.68 2263.78,1073.3 2263.78,849.14 2254.41,839.76 H2.2@2194.88,839.76
  Top Layer w19.68: H2.2@2094.88,839.76 H2.2@2194.88,839.76
  Bottom Layer w16: v1(1184,947.1) 1187.41,950.51 1199.54,950.51 1212.36,963.33 1212.36,1050.06 1240.16,1077.86 v1(1240.16,1082.68) 1240.16,1138.06 1263.09,1161 1349.91,1161 1362.78,1148.12 1362.78,1104.15 U1.2@1365.75,1101.18 ; v1(1220.47,620.08) 1220.47,615.26 1210.63,605.42 1210.63,365.28 R1.2 1259.84,264.76 1272.64,251.97 1344.49,251.97 1345.47,250.98 1345.47,213.19 C1.1 ; H2.2@2094.88,839.76 H2.2@2194.88,839.76
  Bottom Layer w19.68: U1.2@1365.75,1101.18 U1.2@1368.01,1103.44
Vfb: R12.2 R14.2 U3.3 | length 2346
  Top Layer w16: v1@274.14,956.69 264.76,966.07 264.76,1097.91 277.37,1110.52 950.27,1110.52 959.65,1101.15 959.65,648.35 1040,568 v1(1040,491) ; v1(279,850) 279.15,850.15 279.15,955.15 v1(279.3,955.3)
  Bottom Layer w16: v1(279,850) 300,829 394.63,829 407,816.63 407,691.66 422.54,676.12 R14.2 ; R12.2 1038.27,578.98 1038.27,492.73 v1(1040,491) v1@1037.12,488.12
  Bottom Layer w19.68: U3.3 87.8,982.09 116.14,953.74 v1@279.3,953.74
Vin: C12.2 C13.1 H1.1 R17.2 trans1.2 U2.7 | length 2391.6
  Top Layer w16: C12.2 188.11,371.13 R17.2
  Top Layer w19.68: H1.1 103.44,113.28 103.44,175.96 R17.2@188.11,260.63 ; 146.8,216.54 385.53,216.54 409,240 615.31,240 C13.1@681.74,173.57 ; R17.2@188.11,262.6 R17.2 ; trans1.2 346.2,1054.86 480.59,1054.86 492.13,1043.33 492.13,571.87 539.39,524.61 670.21,524.61 681.74,513.08 C13.1@681.74,173.57 ; C13.1 C13.1@681.74,173.57
  Bottom Layer w19.68: trans1.2 351.49,1053.15 385.55,1019.09 U2.7
Voiso: C2.1 C3.1 C5.1 D1.K R5.2 R7.2 U1.13 | length 4254.7
  Top Layer w16: v1(297,321) 337,281 v1(462,281) ; C2.1 893.7,162.4 893.7,81.3 941,34 1783.01,34 v1(1819.88,70.87)
  Top Layer w19.68: v1(452,977) 452,474 v1(513,413)
  Bottom Layer w16: D1.K 70.87,397.64 127.5,341 277,341 v1(297,321) ; R5.2 464.83,413 v1(513,413) ; 489,108.27 870.58,108.27 879.95,117.64 879.95,158.5 C2.1 ; U1.13@1465.75,728.35 1465.75,598.62 1465.55,598.43 1474.41,589.57 1575.79,589.57 1606.3,559.06 1606.3,391.26 1615.67,381.89 1801.65,381.89 1811.02,372.52 1811.02,316.93 C3.1 1871.06,308.07 ; v1(1819.88,70.87) 1872.52,70.87 1881.89,80.24 1881.89,297.24 1871.06,308.07 ; C5.1 1871.06,308.07
  Bottom Layer w19.68: D1.K@51.18,377.95 D1.K@70.87,397.64 ; v1(452,977) 492.47,977 504,965.47 504,896.6 R7.2@493.23,885.83 ; R5.2 v1@461.5,276.57 ; v1@462.48,275.59 v1@461.5,276.57 ; 489,108.27 461.5,135.77 v1@461.5,276.57
Vref: R10.2 U2.8 U3.4 | length 1121.1
  Top Layer w16: v1(537.4,607.28) 537.4,1051.58 554,1068.18 v1(554,1073)
  Bottom Layer w16: R10.2 461.84,554.33 511.38,603.88 534,603.88 v1(537.4,607.28) ; v1(554,1073) 558.82,1073 563.8,1068.01 U2.8@613.19,1068.01
  Bottom Layer w19.68: U3.4 284.51,1103.94 292.94,1112.36 569.92,1112.36 613.19,1069.09 U2.8
pads on no net: U1.15

## Keep-outs
Keep-Out Layer:
  lines w0.39: 0,0 0,1181.1 39.37,1181.1 2303.15,1181.1 2303.15,0 0,0

## Silkscreen, mask and mechanical layers (free items; w line width, h text height)
Top Overlay:
  text "Gate Driver" at 1560,1035 h60
  text "SMPS" at 1703,928 h60
  text "V2.0" at 1726,820 h60

## Text inside footprints (layer, text, board x,y; h text height)
C2: Top Overlay "+" at 844.78,201.32 h60; Mechanical 29 "+" at 844.78,201.32 h60
C13: Top Overlay "+" at 731.99,133.32 h60 r180; Mechanical 29 "+" at 731.99,133.32 h60 r180
D1: Bottom Overlay "C" at 146.64,404.54 h3.94 r180
D2: Bottom Overlay "C" at 2136.83,97.43 h3.94
D3: Top Overlay "C" at 1423.23,652.56 h3.94 r180
D4: Bottom Overlay "C" at 146.64,266.75 h3.94 r180
H2: Top Overlay "1" at 2074.88,1019.76 h50 r270